# EAGLE board tetris_big_noregulator_hole (EAGLE 6.2)
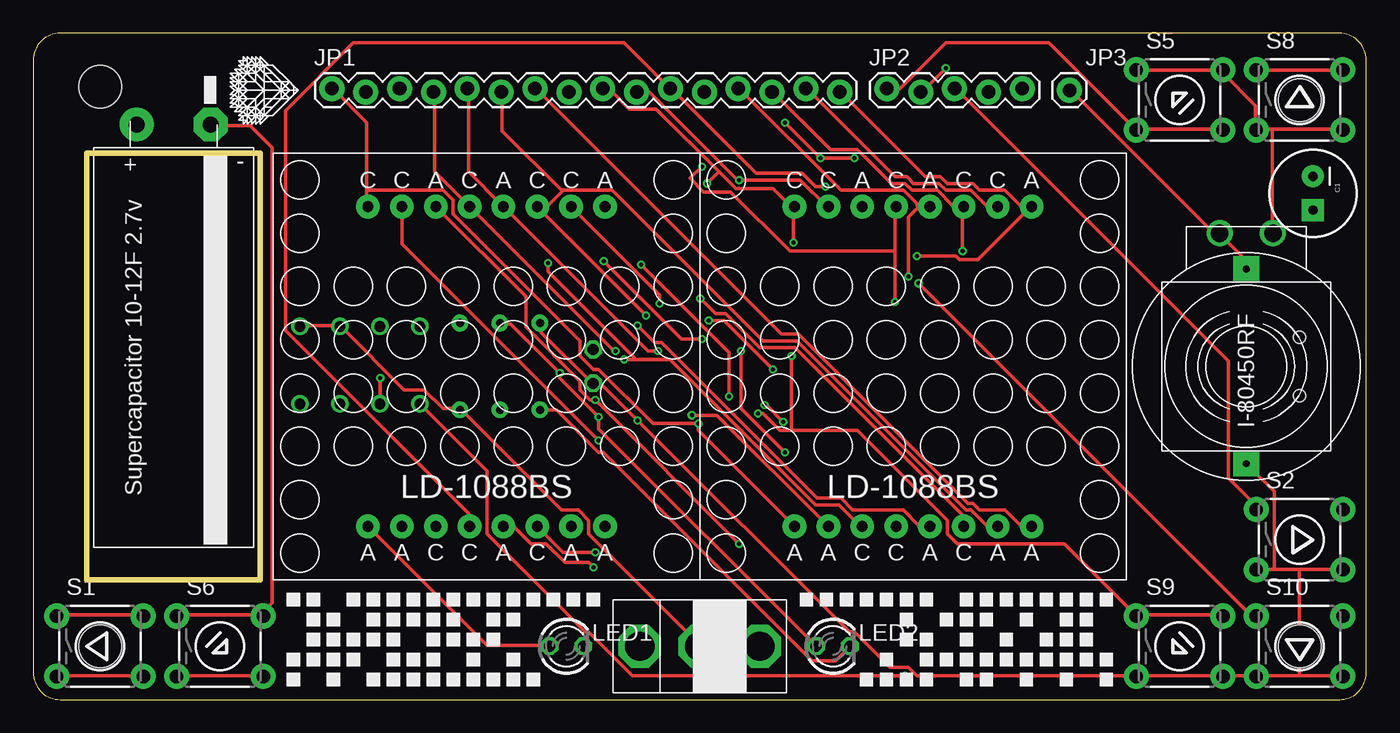
[diagram p0: board, top side]
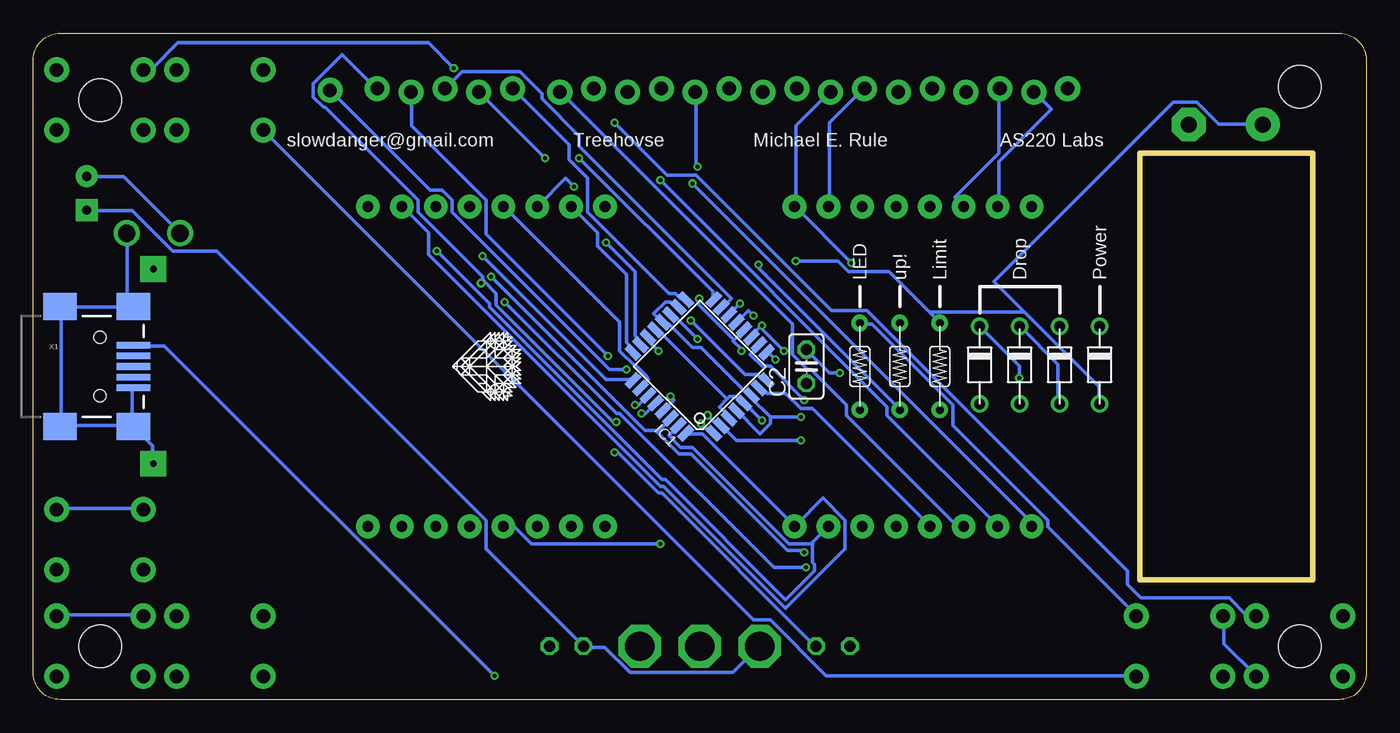
[diagram p1: board, bottom side, seen from below]

Size 100 x 50 mm. Coordinates in mm from the lower left corner, seen from the top.
Outline: 98,50 2,50 arc90 0,48 0,2 arc90 2,0 98,0 arc90 100,2 100,48 arc90 98,50
Outline: 4,41 17,41 17,9 4,9 4,41
Copper layers (1*16): Top 0.035mm / dielectric 1.5mm / Bottom 0.035mm
Design rules: minimum track width 10mil, minimum drill 12mil, track to track 7mil, track to pad 7mil, pad to pad 7mil, via to via 7mil, smd to smd 0mil, copper to edge 20mil, drill to drill 10mil, minimum pad ring 10mil, minimum via ring 6mil, stop-mask expansion 2mil, vias tented up to drill 100mil, thermal gap 10mil
Holes 3.2 mm at 5,4 5,46 95,45 95,4
Milling: 4 lines

## Footprints (pad centres in the part's own frame; a part is rotated, then mirrored left to right if it is on the bottom)
CPOL-RADIAL-100UF-25V = drill 0.7 pad 1.651 square: 1 1.27,0 | drill 0.7 pad 1.651: 2 -1.27,0
C025-025X050 = drill 0.813 octagon: 1 -1.27,0; 2 1.27,0
TQFP32-08 = smd 1.27 x 0.559: 1 -4.293,2.8; 2 -4.293,2; 3 -4.293,1.2; 4 -4.293,0.4; 5 -4.293,-0.4; 6 -4.293,-1.2; 7 -4.293,-2; 8 -4.293,-2.8; 17 4.293,-2.8; 18 4.293,-2; 19 4.293,-1.2; 20 4.293,-0.4; 21 4.293,0.4; 22 4.293,1.2; 23 4.293,2; 24 4.293,2.8 | smd 0.559 x 1.27: 9 -2.8,-4.293; 10 -2,-4.293; 11 -1.2,-4.293; 12 -0.4,-4.293; 13 0.4,-4.293; 14 1.2,-4.293; 15 2,-4.293; 16 2.8,-4.293; 25 2.8,4.293; 26 2,4.293; 27 1.2,4.293; 28 0.4,4.293; 29 -0.4,4.293; 30 -1.2,4.293; 31 -2,4.293; 32 -2.8,4.293
1X16_LOCK = drill 1.016 pad 1.88: 1 0,0.127; 2 2.54,-0.127; 3 5.08,0.127; 4 7.62,-0.127; 5 10.16,0.127; 6 12.7,-0.127; 7 15.24,0.127; 8 17.78,-0.127; 9 20.32,0.127; 10 22.86,-0.127; 11 25.4,0.127; 12 27.94,-0.127; 13 30.48,0.127; 14 33.02,-0.127; 15 35.56,0.127; 16 38.1,-0.127
1X05_LOCK = drill 1.016 pad 1.88: 1 0,0.127; 2 2.54,-0.127; 3 5.08,0.127; 4 7.62,-0.127; 5 10.16,0.127
1X01 = drill 1.016 pad 1.88: 1 0,0
LED3MM = drill 0.813 octagon: A -1.27,0; K 1.27,0
TACTILE-PTH = drill 1.016 pad 1.88: 1 -3.251,2.261; 2 3.251,2.261; 3 -3.251,-2.261; 4 3.251,-2.261
LD-1088BS = drill 0.8 pad 1.778: A1 8.89,12; A2 1.27,12; A3 -3.81,12; A4 8.89,-12; A5 6.35,-12; A6 1.27,-12; A7 -6.35,-12; A8 -8.89,-12; C1 6.35,12; C2 3.81,12; C3 -1.27,12; C4 -6.35,12; C5 -8.89,12; C6 3.81,-12; C7 -1.27,-12; C8 -3.81,-12
ISK4.1K_I-80450RF_I2G = drill 0.5 pad 1.93 square: P$1 -7.303,0; P$2 7.303,0
NICHICON_10X30 = drill 1.2 pad 2.54 octagon: P$1 3.23,-1.75 | drill 1.2 pad 2.54: P$2 8.77,-1.75
PIEZO_ROUND_ENCASED_PTH = drill 1.3: P$1 10,2; P$2 10,-2
R-7 = drill 0.6 pad 1.27: P$1 -3.25,0; P$2 3.25,0
SWITCH_BIG = drill 2.2 octagon: P$1 -4.5,0; P$2 0,0; P$3 4.5,0
D-7.5 = drill 0.813: A 2.81,0; C -3,0
USB-MINIB = smd 2.5 x 0.5: D+ 2.5,0; D- 2.5,0.8; GND 2.5,-1.6; ID 2.5,-0.8; VBUS 2.5,1.6 | smd 2.5 x 2: MTN1 -3,4.5; MTN2 2.5,4.5; MTN3 -3,-4.5; MTN4 2.5,-4.5 | hole 0.9: 0,2.2; 0,-2.2

## Placement (x,y rotation side)
C1  [CPOL-RADIAL-100UF-25V]  96,38 270 top
C2  [C025-025X050]  42,25 90 bottom
IC1  MEGA8-AI  [TQFP32-08]  50,25 135 bottom
JP1  M16LOCK  [1X16_LOCK]  22.4,45.72 0 top
JP2  [1X05_LOCK]  64.04,45.72 0 top
JP3  M01PTH  [1X01]  77.74,45.72 0 top
LED1  [LED3MM]  40,4 0 top
LED2  [LED3MM]  60,4 0 top
S1  [TACTILE-PTH]  5,4 0 top
S2  [TACTILE-PTH]  95,12 0 top
S5  [TACTILE-PTH]  86,45 0 top
S6  [TACTILE-PTH]  14,4 0 top
S8  [TACTILE-PTH]  95,45 0 top
S9  [TACTILE-PTH]  86,4 0 top
S10  [TACTILE-PTH]  95,4 0 top
U$1  LD-1088BS  [LD-1088BS]  34,25 0 top
U$2  LD-1088BS  [LD-1088BS]  66,25 0 top
U$3  LOGO  [LOGO]  17.32,45.72 90 top
U$4  I-80450RF  [ISK4.1K_I-80450RF_I2G]  91,25 270 top
U$5  NICHICON_12F  [NICHICON_10X30]  16.53,41.41 180 top
U$6  LOGO  [LOGO]  66,25 270 bottom
U$7  PIEZO_ROUND_PTH  [PIEZO_ROUND_ENCASED_PTH]  91,25 90 top
U$8  R-7  [R-7]  32,25 270 bottom
U$9  SPST_BIG_PTH  [SWITCH_BIG]  50,4 0 top
U$10  R-7  [R-7]  35,25 90 bottom
U$11  R-7  [R-7]  38,25 90 bottom
U$13  D-6  [D-7.5]  23,25 270 bottom
U$14  D-6  [D-7.5]  26,25 270 bottom
U$15  D-6  [D-7.5]  29,25 270 bottom
U$16  D-6  [D-7.5]  20,25 270 bottom
X1  USB-MINIB-5PIN  [USB-MINIB]  95,25 0 bottom

## Library data of the parts
C1 X1 = SparkFun
C2 = rcl
IC1 = atmel; MPN: ATMEGA8-16AU; OC_FARNELL: 9171371; OC_NEWARK: 73M8863
JP1-JP3 = SparkFun-Connectors
LED1 LED2 = led
S1 S2 S5 S6 S8-S10 = SparkFun-Electromechanical
U$1 U$2 U$4 U$5 U$7-U$11 U$13-U$16 = mrule
U$3 U$6 = mrule2

## Nets
GND: C2.1 IC1.3 IC1.5 IC1.21 S1.3 S1.4 S2.3 S2.4 S5.1 S5.2 S6.1 S6.2 S8.3 S8.4 S9.3 S9.4 S10.3 S10.4 U$4.P$2 U$5.P$1 U$7.P$2 U$11.P$2 X1.GND X1.MTN1 X1.MTN2 X1.MTN3 X1.MTN4
N$1: IC1.32 JP1.15 U$1.A4 U$2.C1
N$2: IC1.31 JP1.14 U$1.A5 U$2.C2
N$3: IC1.30 JP1.13 U$1.C6 U$2.A2
N$4: IC1.26 JP1.12 U$1.A6 U$2.C3
N$5: IC1.7 JP1.11 U$1.C7 U$2.A3
N$6: IC1.24 JP1.10 U$1.A7 U$2.C4
N$7: IC1.23 JP1.9 LED1.A U$1.A8 U$2.C5
N$8: IC1.25 JP1.16 U$1.C8 U$2.A1
N$9: U$15.A X1.VBUS
N$10: IC1.13 JP1.6 U$1.C2 U$2.A5
N$11: IC1.12 JP1.5 U$1.A2 U$2.C6
N$12: IC1.11 JP1.4 U$1.C3 U$2.A6
N$13: IC1.10 JP1.3 U$1.A3 U$2.C7
N$14: IC1.9 JP1.8 U$1.A1 U$2.C8
N$15: IC1.2 JP1.2 U$1.C4 U$2.A7
N$16: IC1.1 JP1.1 U$1.C5 U$2.A8
N$17: C1.2 IC1.8 JP3.1 U$4.P$1 U$7.P$1
N$18: U$14.A U$15.C
N$19: IC1.29 U$10.P$1
N$20: IC1.27 JP2.5 S10.1 S10.2
N$21: IC1.28 JP2.4 S9.1 S9.2
N$22: IC1.15 JP2.3 S2.1 S2.2
N$23: IC1.16 JP2.2 S1.1 S1.2 S8.1 S8.2
N$24: U$8.P$2 U$9.P$2 U$13.C U$16.C
N$25: IC1.19 U$5.P$2 U$8.P$1 U$16.A
N$26: IC1.17 JP2.1 S5.3 S5.4 S6.3 S6.4
N$27: U$13.A U$14.C
N$28: IC1.14 JP1.7 U$1.C1 U$2.A4
N$29: LED2.K U$11.P$1
N$30: IC1.22 LED1.K
VCC: C1.1 C2.2 IC1.4 IC1.6 IC1.18 IC1.20 LED2.A U$9.P$1 U$10.P$2

## Tracks (layer width: path | path; a pad name or v marks a point on that pad's centre or on a via)
GND  (via drill 0.3)
  Top 0.254: 95,9.78 98.17,9.78 S2.4 | 95,9.78 93.09,9.78 | 93.09,9.78 91.82,9.78 S2.3 | 95,1.78 91.82,1.78 S10.3 91.69,1.78 89.28,1.78 S9.4 89.15,1.78 82.8,1.78 S9.3 82.68,1.78 66.29,1.78 65.66,2.41 64.26,2.41 61.59,5.08 61.21,5.08 v45.34,20.95 42.67,23.62 42.04,23.62 C2.1 41.91,23.75 38.1,27.56 38.1,28.19 U$11.P$2 | 95,1.78 98.17,1.78 S10.4 | 95,1.78 95,9.78 | S5.1 82.8,47.24 89.15,47.24 S5.2 89.15,47.12 91.69,44.58 91.69,42.8 S8.3 91.82,42.8 92.96,42.8 | 92.96,42.8 98.17,42.8 S8.4 | 92.96,42.8 92.96,35.05 U$7.P$2 | 93.09,9.78 93.09,15.62 91.06,17.65 U$4.P$2 | S1.3 1.78,1.78 8.13,1.78 S1.4 | S6.1 10.79,6.35 17.14,6.35 S6.2 17.14,6.48 17.91,7.24 17.91,41.4 16.26,43.05 13.34,43.05 U$5.P$1
  Bottom 0.254: X1.MTN4 92.58,20.57 92.58,23.37 X1.GND | X1.MTN4 92.71,20.57 97.92,20.57 X1.MTN3 97.92,20.7 97.92,29.34 X1.MTN1 97.92,29.46 92.96,29.46 | U$4.P$2 91.06,17.78 91.06,19.05 92.46,20.45 X1.MTN4 | 92.96,29.46 92.58,29.46 X1.MTN2 92.96,29.46 | 92.96,29.46 92.96,34.92 U$7.P$2 | 53.34,27.81 IC1.21 53.21,27.69 53.09,27.69 47.94,22.54 | 46.74,22.35 IC1.5 | 47.88,21.21 IC1.3 47.88,21.34 48.51,21.97 47.94,22.54 | 47.94,22.54 47.75,22.73 47.37,22.73 46.99,22.35 46.86,22.35 IC1.5 | v45.34,20.95 46.61,22.23 IC1.5 | S6.1 10.67,6.22 10.67,4.19 8.26,1.78 S1.4 | U$11.P$2 37.97,28.19 37.08,28.19 30.99,22.1 30.99,20.57 23.88,13.46 23.88,12.95 17.27,6.35 S6.2
N$1
  Top 0.254: U$2.C1 72.26,37.08 71.5,37.08 70.36,38.23 68.45,38.23 67.94,38.73 66.04,38.73 65.53,39.24 64.64,39.24 58.04,45.85 JP1.15
  Bottom 0.254: IC1.32 51.05,19.94 49.78,19.94 42.93,13.08 U$1.A4 42.8,13.08 40.77,15.11 39.12,13.46 39.12,11.3 43.56,6.86 52.7,16 52.96,16 70.36,33.4 70.36,35.05 72.26,36.96 U$2.C1
N$2  (via drill 0.3)
  Top 0.254: JP1.14 55.5,45.59 59.82,41.27 61.85,41.27 64.39,38.73 65.41,38.73 65.91,38.23 67.82,38.23 68.96,37.08 69.72,37.08 U$2.C2 69.72,36.96 v69.72,33.66
  Bottom 0.254: 41.59,11.75 40.39,12.95 U$1.A5 | 41.59,11.75 41.66,11.68 43.31,11.68 50.55,18.92 51.44,18.92 52.32,19.81 51.69,20.45 IC1.31 | v69.72,33.66 65.79,29.72 65.79,29.46 52.83,16.51 52.58,16.51 43.56,7.49 41.4,9.65 41.4,10.16 41.53,10.29 41.53,11.68 41.59,11.75
N$3  (via drill 0.3)
  Top 0.254: v42.16,11.05 39.75,11.05 37.85,12.95 U$1.C6 | 66.36,37.15 65.28,38.23 60.58,38.23 52.96,45.85 JP1.13 | 66.36,37.15 66.42,37.08 67.18,37.08 U$2.A2 | v65.66,31.75 65.66,36.2 66.42,36.96 66.29,37.08 66.36,37.15
  Bottom 0.254: 53.15,20.13 53.21,20.07 51.56,18.41 50.67,18.41 43.43,11.18 42.29,11.18 v42.16,11.05 | 53.15,20.13 52.2,21.08 IC1.30 | v65.66,31.75 54.1,20.19 53.21,20.19 53.15,20.13
N$4  (via drill 0.3)
  Top 0.254: v42.04,9.91 41.66,10.29 39.88,10.29 38.48,11.68 37.34,11.68 36.07,12.95 35.31,12.95 U$1.A6 | 64.64,33.66 64.64,36.96 U$2.C3 | 64.64,33.66 v64.64,29.84 | v50.16,40.01 49.28,39.12 50.29,38.1 52.32,38.1 56.77,33.66 64.64,33.66
  Bottom 0.254: IC1.26 54.36,23.5 53.85,24 53.98,24.13 53.98,24.26 54.74,25.02 54.86,25.02 56.01,26.16 56.01,28.32 64.64,36.96 U$2.C3 | v42.04,9.91 44.45,9.91 56.01,21.46 56.26,21.46 v64.64,29.84 | v50.16,40.01 50.29,40.13 50.29,45.59 JP1.12
N$5  (via drill 0.3)
  Top 0.254: v59.44,38.48 58.67,38.48 57.66,39.5 54.23,39.5 47.88,45.85 JP1.11 47.75,45.85 44.32,49.28 24,49.28 18.92,44.2 18.92,27.69 32.64,13.97 32.64,13.08 U$1.C7
  Bottom 0.254: IC1.7 45.47,23.37 45.34,23.37 44.96,22.99 43.56,22.99 42.42,21.84 41.53,21.84 32.77,13.08 U$1.C7 | v59.44,38.48 60.07,39.12 62.1,37.08 U$2.A3
N$6  (via drill 0.3)
  Top 0.254: U$2.C4 59.56,36.96 57.53,38.99 v52.96,38.99 52.83,38.99 46.23,45.59 JP1.10
  Bottom 0.254: IC1.24 55.12,26.16 55.12,26.42 55.5,26.8 55.5,31.88 57.66,34.04 57.66,35.05 59.56,36.96 U$2.C4 | v52.96,38.99 35.94,21.97 35.94,21.34 27.69,13.08 U$1.A7
N$7  (via drill 0.3)
  Top 0.254: LED1.A 38.61,4.06 34.04,4.06 25.15,12.95 U$1.A8 | v57.02,34.29 57.02,36.96 U$2.C5 56.9,36.96 55.5,38.35 52.7,38.35 51.44,39.62 | JP1.9 43.18,45.85 44.7,44.32 46.74,44.32 51.44,39.62 | 51.44,39.62 v50.55,38.73
  Bottom 0.254: v57.02,34.29 54.86,32.13 54.86,27.3 54.48,26.92 54.48,26.67 IC1.23 | v50.55,38.73 25.15,13.34 25.15,13.08 U$1.A8
N$8  (via drill 0.3)
  Top 0.254: v66.29,33.27 69.22,33.27 69.47,33.02 70.87,33.02 74.8,36.96 U$2.A1 74.42,36.7 72.9,38.23 70.99,38.23 70.48,38.73 68.58,38.73 68.07,39.24 66.93,39.24 60.58,45.59 JP1.16
  Bottom 0.254: v66.29,33.27 57.02,24 55.12,24 IC1.25 | U$1.C8 30.23,13.08 30.73,13.08 38.99,21.34 38.99,22.1 41.66,24.77 41.91,24.77 43.05,25.91 43.05,28.19 60.45,45.59 JP1.16
N$9  (via drill 0.3)
  Top 0.254: v65.41,1.78 44.96,1.78 41.66,5.08 41.4,5.08 34.04,12.45 34.04,17.14 29.08,22.1 U$15.A
  Bottom 0.254: v65.41,1.78 90.17,26.54 92.46,26.54 X1.VBUS
N$10  (via drill 0.3)
  Top 0.254: v45.97,28.83 37.85,36.96 U$1.C2 38.23,36.7 39.69,38.16 | 39.69,38.16 39.75,38.23 43.43,38.23 54.74,26.92 57.28,26.92 69.98,14.22 70.36,14.22 71.5,13.08 72.26,13.08 U$2.A5 | 39.69,38.16 35.18,42.67 35.18,45.59 JP1.6
  Bottom 0.254: v45.97,28.83 46.35,29.21 IC1.13
N$11  (via drill 0.3)
  Top 0.254: v46.86,26.16 46.1,26.16 35.31,36.96 U$1.A2 35.18,37.08 32.64,39.62 32.64,45.85 JP1.5 | v50.04,30.1 51.18,28.96 51.94,28.96 54.48,26.42 57.15,26.42 69.72,13.84 69.72,13.08 U$2.C6
  Bottom 0.254: 47.43,26.99 47.5,26.92 46.86,26.29 v46.86,26.16 | 47.43,26.99 46.74,27.69 IC1.12 | v50.04,30.1 50.04,29.59 47.43,26.99
N$12  (via drill 0.3)
  Top 0.254: v43.69,26.16 43.56,26.16 32.77,36.96 U$1.C3 32.64,37.08 30.1,39.62 30.1,45.59 JP1.4 | v45.34,28.07 46.61,26.8 47.12,26.8 58.8,15.11 60.58,15.11 61.47,14.22 65.28,14.22 66.42,13.08 67.18,13.08 U$2.A6
  Bottom 0.254: v43.69,26.16 45.4,27.88 | 45.4,27.88 45.47,27.94 46.1,27.3 IC1.11 | v45.34,28.07 45.34,27.94 45.4,27.88
N$13  (via drill 0.3)
  Top 0.254: U$1.A3 30.23,36.96 36.96,30.23 36.96,27.94 41.02,23.88 41.02,23.24 41.78,22.48 v42.16,22.48 v52.96,11.68
  Bottom 0.254: v42.16,22.48 44.7,25.02 45.34,25.02 46.23,25.91 45.59,26.54 IC1.10 | v52.96,11.68 62.61,11.68 63.88,12.95 64.64,12.95 U$2.C7 | JP1.3 27.56,45.85 27.56,41.02 30.86,37.72 30.23,37.08 U$1.A3
N$14  (via drill 0.3)
  Top 0.254: 45.21,25.53 47.75,25.53 58.67,14.61 60.45,14.61 62.1,12.95 U$2.C8 | 45.21,25.53 v44.32,25.53 | v38.61,32.77 38.61,32.13 45.21,25.53
  Bottom 0.254: JP1.8 40.26,45.59 42.8,43.05 42.8,37.08 U$1.A1 42.8,36.96 v38.61,32.77 | v44.32,25.53 44.83,26.04 44.96,26.04 IC1.9
N$15  (via drill 0.3)
  Top 0.254: v49.4,21.34 51.31,21.34 59.56,13.08 U$2.A7 | v42.42,19.43 27.69,34.16 27.69,36.96 U$1.C4
  Bottom 0.254: U$1.C4 27.56,37.08 27.56,40.39 23.62,44.32 24.89,45.59 JP1.2 | v49.4,21.34 48.64,20.57 48.39,20.57 IC1.2 48.26,20.45 47.24,19.43 v42.42,19.43
N$16  (via drill 0.3)
  Top 0.254: U$2.A8 57.02,13.08 49.91,20.19 v49.91,20.7 46.48,20.7 42.42,24.77 42.04,24.77 41.02,25.78 41.02,26.92 31.5,36.45 31.5,37.47 30.73,38.23 25.02,38.23 | 25.02,38.23 25.02,43.31 22.48,45.85 JP1.1 | 25.02,38.23 25.02,37.08 U$1.C5
  Bottom 0.254: v49.91,20.7 49.28,20.07 49.02,20.07 IC1.1
N$17  (via drill 0.3)
  Top 0.254: U$4.P$1 90.93,32.38 90.93,33.02 89.03,34.92 U$7.P$1 88.9,35.05 88.52,35.05 77.85,45.72 JP3.1 | v50.67,28.45 51.82,28.45 v55.5,24.77
  Bottom 0.254: C1.2 95.89,39.24 93.22,39.24 89.03,35.05 U$7.P$1 | v50.67,28.45 46.61,24.38 45.72,24.38 45.34,24 45.09,24 IC1.8 | v55.5,24.77 56.77,24.77 68.58,36.58 68.58,37.47 69.34,38.23 70.23,38.23 77.72,45.72 JP3.1
N$18  (via drill 0.3)
  Top 0.254: v26.04,24.13 26.04,22.23 U$14.A
  Bottom 0.254: v26.04,24.13 26.04,25.02 28.96,27.94 U$15.C
N$19  (via drill 0.3)
  Top 0.254: v52.2,22.73 52.2,26.04 v45.59,32.64
  Bottom 0.254: v52.2,22.73 51.94,22.48 52.7,21.72 IC1.29 | v45.59,32.64 45.59,32.38 35.05,21.84 U$10.P$1
N$20  (via drill 0.3)
  Top 0.254: v54.86,22.1 54.99,22.1 v56.26,20.83 | v66.42,31.24 91.31,6.35 91.69,6.35 S10.1
  Bottom 0.254: S10.1 91.82,6.35 98.17,6.35 S10.2 | v54.86,22.1 54.74,21.97 53.98,22.73 IC1.27 | v56.26,20.83 56.52,20.83 65.28,29.59 65.28,30.48 66.23,31.43 | 66.23,31.43 66.29,31.5 66.29,31.75 71.12,36.58 71.12,37.47 78.11,44.45 78.23,44.45 78.99,45.21 78.99,46.23 76.83,48.39 74.3,45.85 JP2.5 | 66.23,31.43 v66.42,31.24
N$21  (via drill 0.3)
  Top 0.254: v54.36,21.46 54.74,21.46 56.01,20.19 56.9,20.19 | 56.9,20.19 61.85,20.19 68.58,13.46 68.58,12.45 69.34,11.68 77.34,11.68 82.68,6.35 S9.1 82.8,6.35 89.15,6.35 S9.2 | 56.9,20.19 v56.9,25.78
  Bottom 0.254: v54.36,21.46 54.23,21.34 53.34,22.23 IC1.28 | v56.9,25.78 66.04,34.92 66.04,37.47 71.63,43.05 71.63,45.59 JP2.4
N$22
  Top 0.254: S2.1 91.69,14.35 91.69,14.61 89.66,16.64 89.66,25.4 69.22,45.85 JP2.3
  Bottom 0.254: S2.1 91.82,14.35 98.17,14.35 S2.2 | IC1.15 48.26,29.46 47.62,30.1 59.05,41.53 59.05,42.29 61.85,45.09 61.85,45.47 63.5,47.12 67.82,47.12 69.09,45.85 JP2.3
N$23  (via drill 0.3)
  Top 0.254: S8.1 91.82,47.24 98.17,47.24 S8.2 | S1.1 1.78,6.35 8.13,6.35 S1.2 | v61.59,40.64 v59.05,40.64 v56.39,43.31 | v68.45,47.37 66.67,45.59 JP2.2
  Bottom 0.254: v59.05,40.64 49.02,30.61 49.02,30.1 IC1.16 | v61.59,40.64 66.55,45.59 JP2.2 | v56.39,43.31 52.45,39.37 50.29,39.37 40.13,29.21 37.47,29.21 17.91,9.65 17.91,8.64 16.89,7.62 10.29,7.62 9.02,6.35 8.26,6.35 S1.2 | v68.45,47.37 70.36,49.28 89.15,49.28 91.06,47.37 91.69,47.37 S8.1
N$24
  Top 0.254: U$16.C 20.07,28.07 22.99,28.07 U$13.C 23.11,27.94 27.81,23.24 29.34,23.24 30.73,21.84 31.88,21.84 U$8.P$2 32.13,21.72 39.62,14.22 40.89,14.22 41.66,13.46 41.66,12.45 49.91,4.19 49.91,4.06 U$9.P$2
N$25  (via drill 0.3)
  Top 0.254: v50.16,27.05 48.64,27.05 v42.8,32.89
  Bottom 0.254: v50.16,27.05 51.94,28.83 52.07,28.83 IC1.19 | v42.8,32.89 39.62,32.89 38.86,32.13 35.81,32.13 32.7,29.02 | 32.7,29.02 32,28.32 U$8.P$1 | 25.65,29.08 20.07,23.5 20.07,22.23 U$16.A | 25.65,29.08 32.64,29.08 32.7,29.02 | 25.65,29.08 27.94,31.37 14.48,44.83 12.7,44.83 11.05,43.18 7.87,43.18 U$5.P$2
N$26
  Top 0.254: S6.3 10.79,1.78 17.14,1.78 S6.4 | S5.4 89.15,42.8 82.8,42.8 S5.3 82.68,42.8 76.2,49.28 68.45,49.28 65.02,45.85 JP2.1
  Bottom 0.254: IC1.17 51.18,30.1 51.44,30.1 51.82,30.48 52.32,30.48 58.42,36.58 58.42,39.12 59.82,40.51 59.82,41.66 64.01,45.85 JP2.1 | S6.4 17.27,1.78 40.51,1.78 44.7,5.97 45.97,5.97 82.68,42.67 S5.3
N$27
  Bottom 0.254: U$13.A 23.11,22.23 23.11,25.15 25.91,27.94 U$14.C
N$28  (via drill 0.3)
  Top 0.254: v46.99,29.72 46.99,30.35 40.39,36.96 U$1.C1 | U$2.A4 74.8,13.08 74.04,13.08 72.9,14.22 70.99,14.22 70.48,14.73 70.1,14.73 57.4,27.43 56.13,27.43 37.72,45.85 JP1.7
  Bottom 0.254: v46.99,29.72 47.75,28.96 IC1.14 | U$1.C1 40.26,37.08 40.26,43.31 37.72,45.85 JP1.7
N$29
  Top 0.254: U$11.P$1 38.1,21.72 39.24,21.72 42.42,18.54 42.8,18.54 58.42,2.92 60.2,2.92 61.21,3.94 LED2.K
N$30  (via drill 0.3)
  Top 0.254: v53.09,26.16 53.09,21.84 v56.39,18.54
  Bottom 0.254: v53.09,26.16 53.85,26.92 53.85,27.18 IC1.22 | v56.39,18.54 56.13,18.54 53.09,15.49 52.83,15.49 41.27,3.94 LED1.K
VCC  (via drill 0.3)
  Top 0.254: U$10.P$2 35.05,28.19 35.81,28.19 v39.5,24.51 39.5,24.13 v42.42,21.21 42.42,20.32 58.67,4.06 LED2.A
  Bottom 0.254: v39.5,24.51 40.26,24.51 41.91,26.16 C2.2 | IC1.18 51.69,29.46 51.82,29.46 52.2,29.84 52.58,29.84 53.47,28.96 52.83,28.32 IC1.20 52.7,28.19 52.32,28.19 50.55,26.42 49.91,26.42 46.35,22.86 IC1.6 | 46.23,22.86 IC1.6 | 47.37,21.72 IC1.4 47.24,21.72 45.47,19.94 44.7,20.7 44.7,21.21 | 44.7,21.21 46.1,22.61 46.1,22.73 IC1.6 | 44.7,21.21 v42.42,21.21 | U$9.P$1 45.59,3.94 47.5,2.03 55.24,2.03 57.15,3.94 58.67,3.94 LED2.A 58.8,4.06 66.04,11.3 66.04,13.46 86.23,33.66 89.53,33.66 92.58,36.7 95.89,36.7 C1.1

## Text on the board
bPlace: AS220 Labs | Michael E. Rule | Treehovse | slowdanger@gmail.com | Power | Drop | Limit | up! | LED